# Altium PCB PowerManagement.PcbDoc
Units mm, origin at the board's own origin, x right, y up, seen from the top; angles counter-clockwise.
Board outline 40 x 40 mm, 2 copper layers (L1, L2), stack 1.671 mm thick; 47 components, 37 nets, 181 pads, 107 vias.
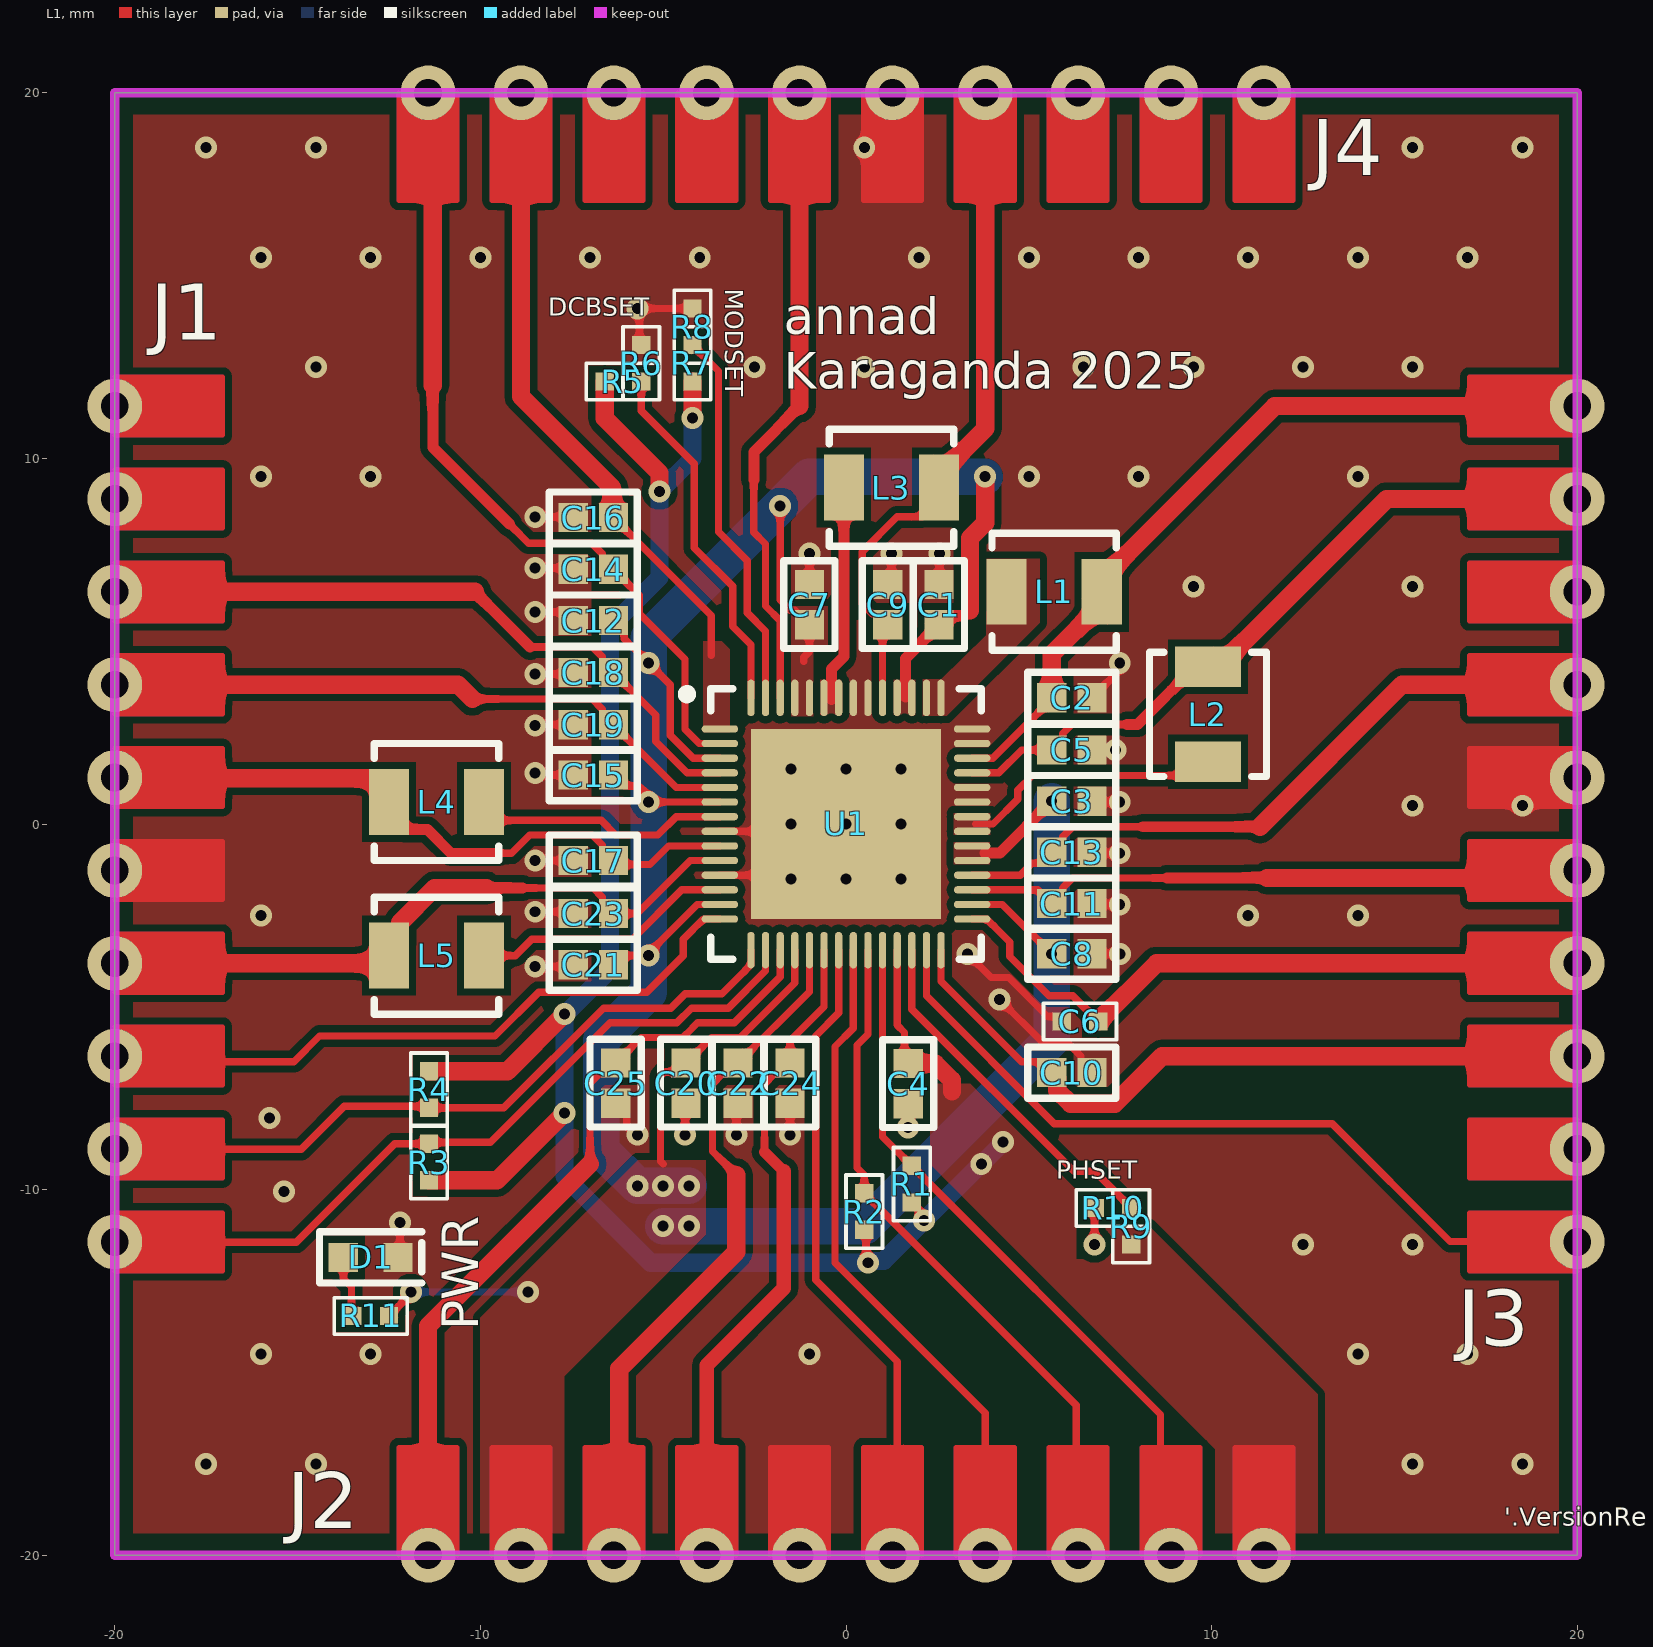
[diagram p0: L1 view]
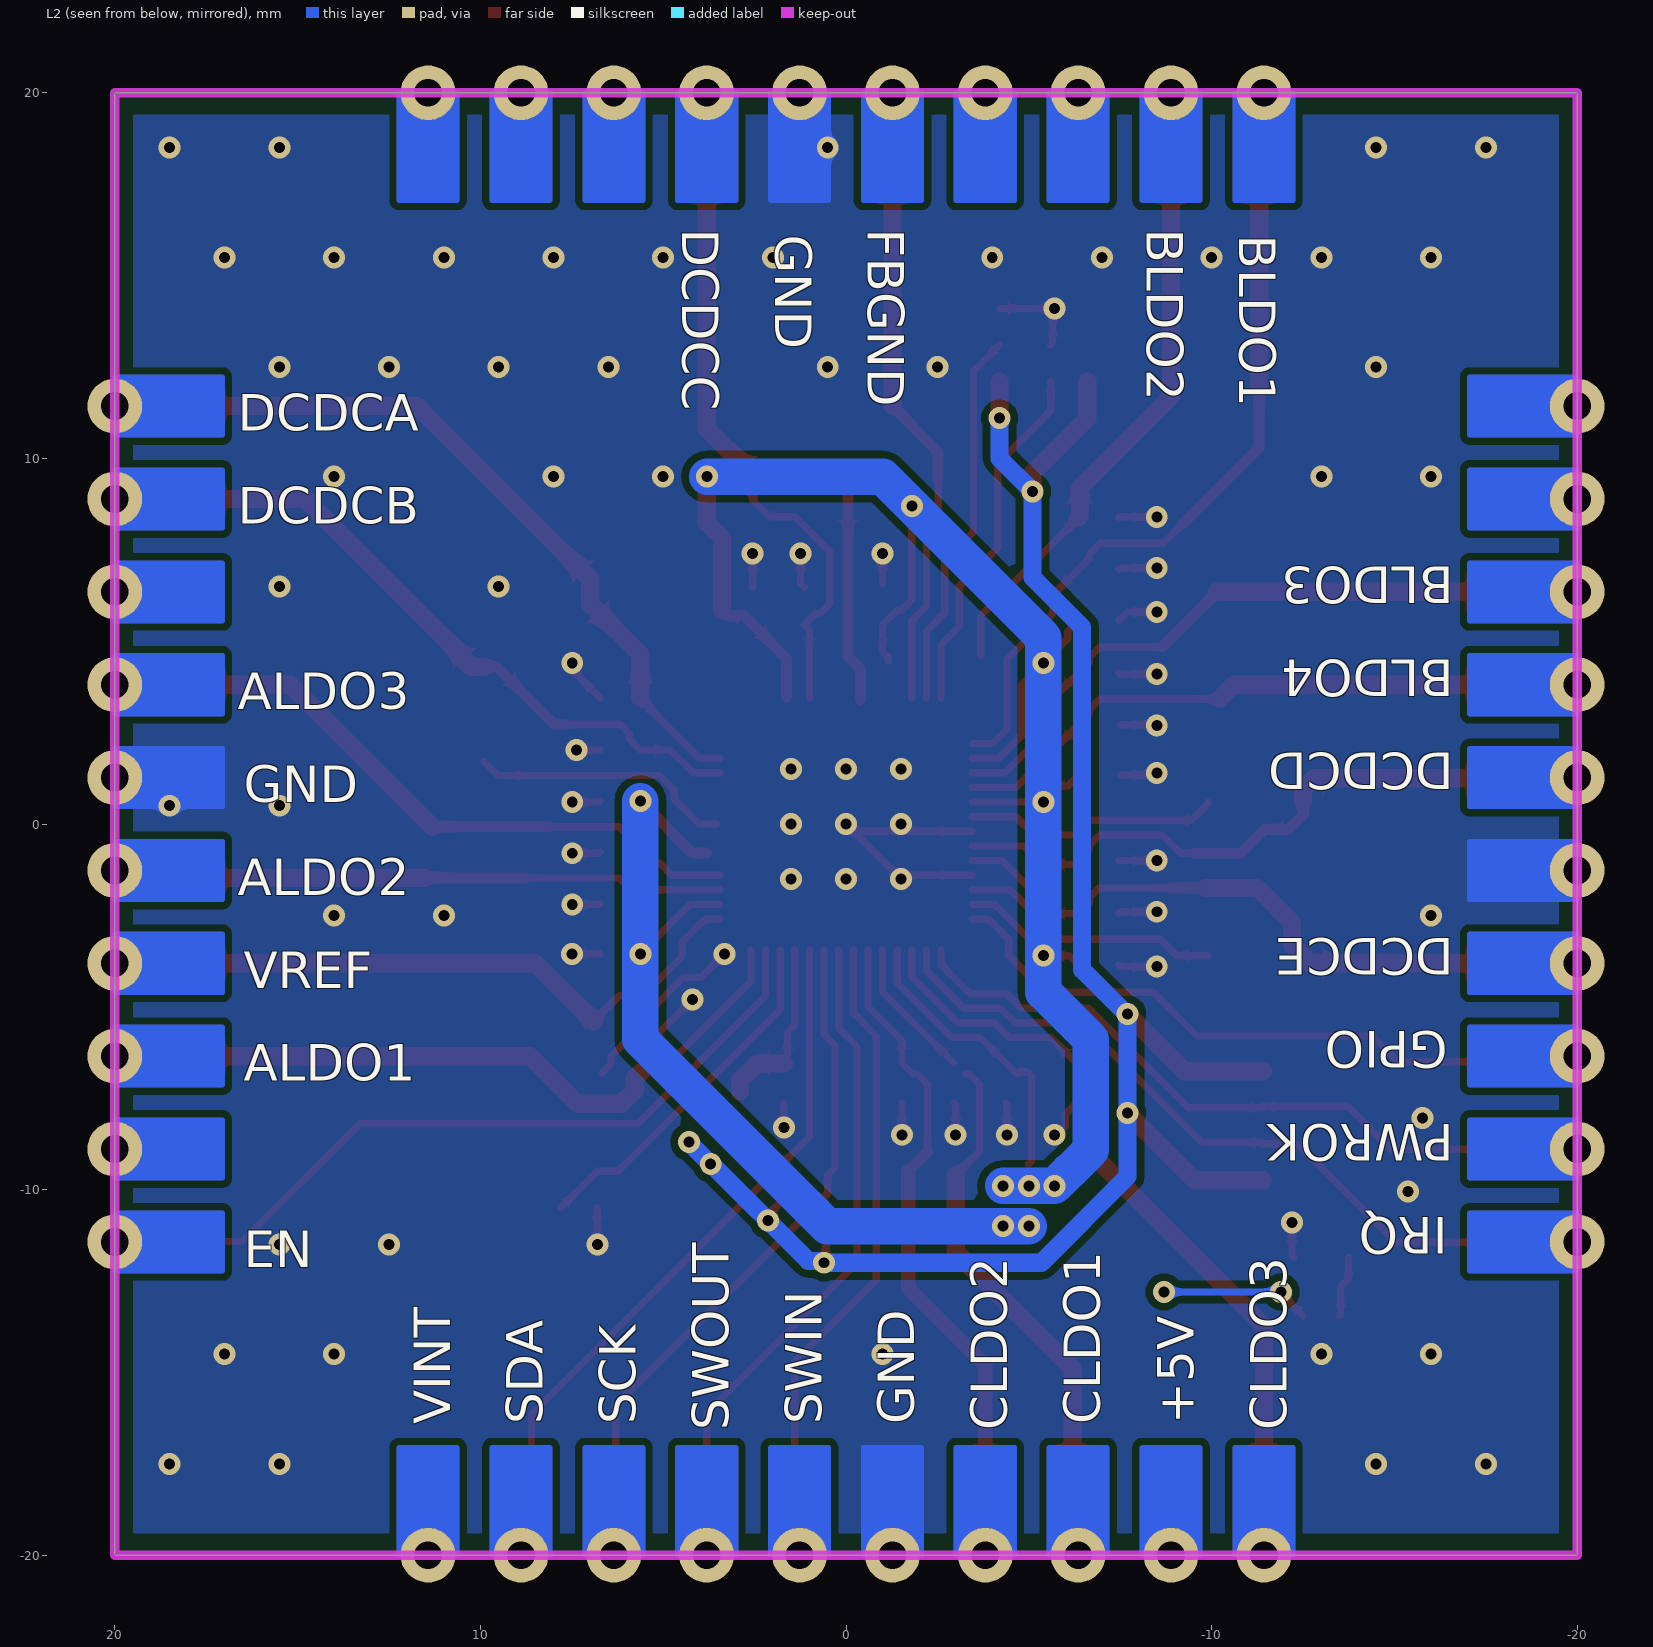
[diagram p1: L2 view, seen from below]
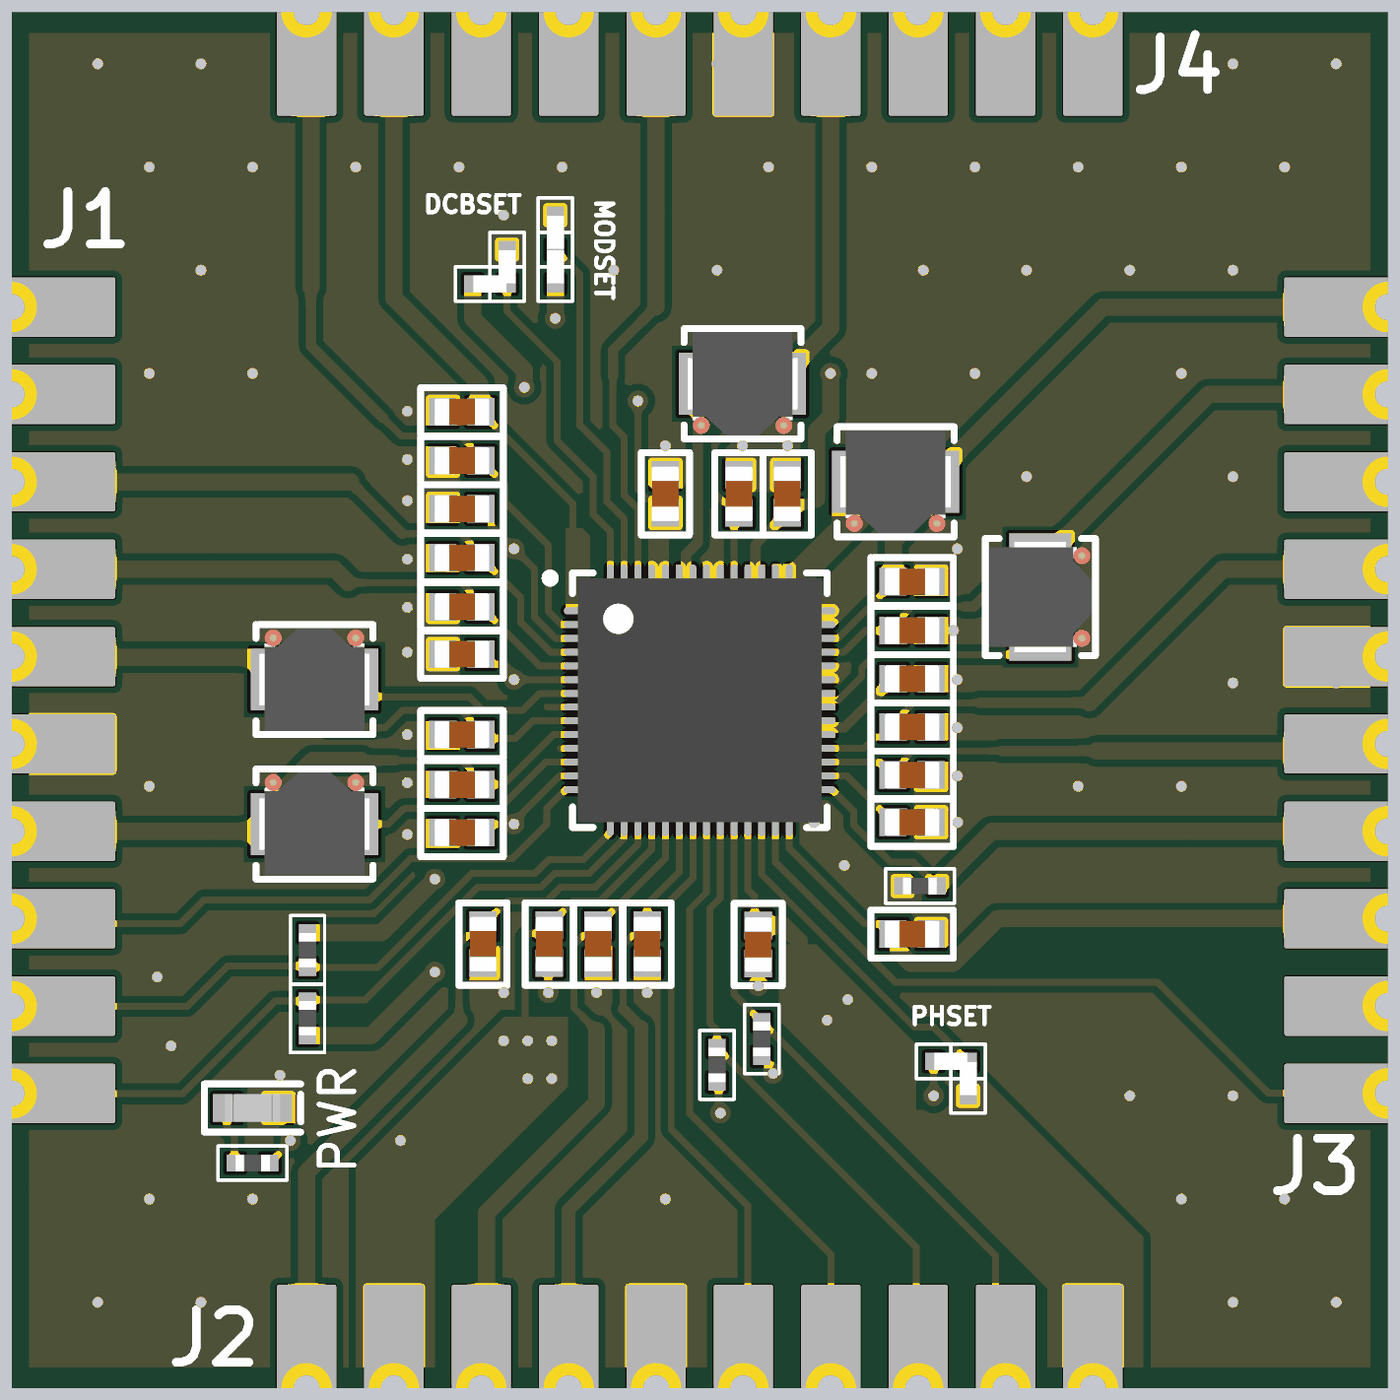
[diagram p2: 3D render of the assembled board from above, using the file's embedded part models]

## Layer stack, top to bottom
Top Solder: solder mask 0.0102, Solder Resist, Dk 3.5
L1: signal copper 0.0356
Dielectric 1: dielectric 1.6, FR-4, Dk 4.8
L2: signal copper 0.0356
Bottom Solder: solder mask 0.0102, Solder Resist, Dk 3.5

## Board outline
-20,-20 -20,20 20,20 20,-20

## Design rules (kind name [scope] priority, off if disabled: settings)
Clearance ExceptionCastallatedHolesKeepOut [HasFootprint('CAST10_2.54MM') vs OnLayer('Keep-Out Layer')] p1: gap=0 ignorepadtopadclearanceinfootprint=FALSE
Clearance [All] p2: gap=0.2 ignorepadtopadclearanceinfootprint=FALSE
ComponentClearance ExceptionJumpResistors [InComponentClass('JumperResistorClass') vs InComponentClass('JumperResistorClass')] p1: gap=0 collisioncheckmode=3 verticalgap=0 showdistances=FALSE
ComponentClearance [All] p2: gap=0.2 collisioncheckmode=3 verticalgap=0.2 showdistances=FALSE
HoleSize [All] p1: absolutevalues=TRUE maxlimit=10 minlimit=0.2 maxpercent=80.000 minpercent=20.000
HoleToHoleClearance [All] p1: gap=0.3 allowstackedmicrovias=TRUE
MinimumSolderMaskSliver [All] p1: minsoldermaskwidth=0.1
PlaneConnect [All] p1: planeconnectstyle=Direct reliefexpansion=0.508 reliefentries=4 reliefconductorwidth=0.254 reliefairgap=0.254
PolygonConnect [All] p1: connectstyle=Direct reliefconductorwidth=0.254 reliefentries=4 polygonreliefangle="90 Angle" airgapwidth=0.254
RoutingVias [All] p1: holewidth=0.3 width=0.6 viastyle="Through Hole" minholewidth=0.3 minwidth=0.6 maxholewidth=0.3 maxwidth=0.6
SilkToSilkClearance [All] p1: silktosilkclearance=0.1
SilkToSolderMaskClearance [IsPad] p1: minsilkscreentomaskgap=0.1 clearancetoexposedcopper=TRUE
SolderMaskExpansion [All] p1: expansion=0.1 istentingtop=FALSE
Width ExceptionWidthArc [HasFootprint('CAST10_2.54MM')] p1: maxlimit=0.2 minlimit=0.1 preferedwidth=0.127
Width ExceptionWidthPowerSupply [InNetClass('PowerNetClass')] p2: maxlimit=1 minlimit=0.1 preferedwidth=0.5
Width [All] p3: maxlimit=0.5 minlimit=0.2 preferedwidth=0.3
23 further rules are at their usual default settings.

## Classes and differential pairs
net class PowerNetClass: PMIC_VINT PS VREF
component class JumperResistorClass: R5 R6 R7 R8 R9 R10

## Components (designator, comment, footprint, x,y, rotation, side; value= is the part's Value field where it differs from the comment)
C1 "10u / 10V" C0603 2.543,6 r90 top
C2 "10u / 10V" C0603 6.175,3.45 r180 top
C3 "10u / 10V" C0603 6.175,0.625 r0 top
C4 "10u / 10V" C0603 1.7,-7.1 r90 top
C5 "10u / 10V" C0603 6.175,2.025 r180 top
C6 "1u / 6.3V" C0402 6.4,-5.4 r0 top
C7 "10u / 10V" C0603 -1,6 r90 top
C8 "10u / 10V" C0603 6.175,-3.55 r180 top
C9 "10u / 10V" C0603 1.143,6 r270 top
C10 "10u / 10V" C0603 6.175,-6.8 r180 top
C11 "10u / 10V" C0603 6.175,-2.175 r180 top
C12 "10u / 10V" C0603 -6.912,5.565 r0 top
C13 "10u / 10V" C0603 6.175,-0.775 r180 top
C14 "4.7u / 10V" C0603 -6.912,6.965 r0 top
C15 "10u / 10V" C0603 -6.912,1.34 r180 top
C16 "4.7u / 10V" C0603 -6.912,8.382 r0 top
C17 "10u / 10V" C0603 -6.912,-1 r0 top
C18 "4.7u / 10V" C0603 -6.912,4.14 r0 top
C19 "4.7u / 10V" C0603 -6.912,2.718 r0 top
C20 "10u / 10V" C0603 -4.375,-7.089 r90 top
C21 "10u / 10V" C0603 -6.912,-3.85 r180 top
C22 "10u / 10V" C0603 -2.953,-7.089 r90 top
C23 "10u / 10V" C0603 -6.912,-2.45 r0 top
C24 "10u / 10V" C0603 -1.53,-7.089 r90 top
C25 "10u / 10V" C0603 -6.3,-7.089 r90 top
D1 "Green" LED_0603 -13,-11.854 r180 top
J1 "CAST10" CAST10_2.54MM -20,11.43 r0 top locked
J2 "CAST10" CAST10_2.54MM -11.43,-20 r90 top locked
J3 "CAST10" CAST10_2.54MM 20,-11.43 r180 top locked
J4 "CAST10" CAST10_2.54MM 11.43,20 r270 top locked
L1 "1.5u / 3A" SPM3015 5.693,6.35 r0 top
L2 "1.5u / 3A" SPM3015 9.9,3 r90 top
L3 "1.5u / 3A" SPM3015 1.243,9.2 r0 top
L4 "1.5u / 3A" SPM3015 -11.2,0.6 r180 top
L5 "1.5u / 3A" SPM3015 -11.2,-3.6 r180 top
R1 "2k" R0402 1.8,-9.85 r270 top
R2 "2k" R0402 0.5,-10.6 r270 top
R3 "2k" R0402 -11.405,-9.246 r270 top
R4 "2k" R0402 -11.405,-7.264 r90 top
R5 "0R" R0402 -6.1,12.1 r0 top
R6 "0R" R0402 -5.6,12.6 r90 top
R7 "0R" R0402 -4.2,12.6 r90 top
R8 "0R" R0402 -4.2,13.6 r90 top
R9 "0R" R0402 7.8,-11 r90 top
R10 "0R" R0402 7.3,-10.5 r180 top
R11 "560R" R0402 -13,-13.454 r180 top
U1 "AXP805" QFN7X7MM 0,0 r0 top locked

## Footprints (in the part's own frame and the unit in brackets; to place one, negate y for a bottom-side part, rotate by r counter-clockwise, add the part's x,y. Pads: shape width x height; smd on the part's side, far side on the other; paste and mask are expansions set on the pad)
C0402 [mm]
  rect 0.5x0.5 smd: 1(-0.5,0) 2(0.5,0)
  silkscreen extent -1,-0.5 1,0.5, body extent -0.5,-0.25 0.5,0.25, height 0.55
C0603 [mm]
  rect 0.8x0.8 smd: 1(-0.55,0) 2(0.55,0)
  silkscreen extent -1.2,-0.7 1.2,0.7, body extent -0.8,-0.4 0.8,0.4, height 0.91
CAST10_2.54MM [mm]
  round 1.5 hole 0.76 mask+0: 1(0,0) 2(0,-2.54) 3(0,-5.08) 4(0,-7.62) 5(0,-10.16) 6(0,-12.7) 7(0,-15.24) 8(0,-17.78) 9(0,-20.32) 10(0,-22.86)
  L1 region: 0,-23.66 2.946,-23.66 2.946,-22.06 0,-22.06 0.347,-22.139 0.625,-22.361 0.78,-22.682 0.78,-23.038 0.625,-23.359 0.347,-23.581 0,-23.66
  L1 region: 0,-18.58 2.946,-18.58 2.946,-16.98 0,-16.98 0.347,-17.059 0.625,-17.281 0.78,-17.602 0.78,-17.958 0.625,-18.279 0.347,-18.501 0,-18.58
  L1 region: 0,-16.04 2.946,-16.04 2.946,-14.44 0,-14.44 0.347,-14.519 0.625,-14.741 0.78,-15.062 0.78,-15.418 0.625,-15.739 0.347,-15.961 0,-16.04
  L1 region: 0,-13.5 2.946,-13.5 2.946,-11.9 0,-11.9 0.347,-11.979 0.625,-12.201 0.78,-12.522 0.78,-12.878 0.625,-13.199 0.347,-13.421 0,-13.5
  L1 region: 0,-8.42 2.946,-8.42 2.946,-6.82 0,-6.82 0.347,-6.899 0.625,-7.121 0.78,-7.442 0.78,-7.798 0.625,-8.119 0.347,-8.341 0,-8.42
  L1 region: 0,-5.88 2.946,-5.88 2.946,-4.28 0,-4.28 0.347,-4.359 0.625,-4.581 0.78,-4.902 0.78,-5.258 0.625,-5.579 0.347,-5.801 0,-5.88
  L1 region: 0,-3.34 2.946,-3.34 2.946,-1.74 0,-1.74 0.347,-1.819 0.625,-2.041 0.78,-2.362 0.78,-2.718 0.625,-3.039 0.347,-3.261 0,-3.34
  L1 region: 0,-0.8 2.946,-0.8 2.946,0.8 0,0.8 0.347,0.721 0.625,0.499 0.78,0.178 0.78,-0.178 0.625,-0.499 0.347,-0.721 0,-0.8
  L1 region: 0,-21.12 2.946,-21.12 2.946,-19.52 0,-19.52 0.347,-19.599 0.625,-19.821 0.78,-20.142 0.78,-20.498 0.625,-20.819 0.347,-21.041 0,-21.12
  L1 region: 0,-10.96 2.946,-10.96 2.946,-9.36 0,-9.36 0.347,-9.439 0.625,-9.661 0.78,-9.982 0.78,-10.338 0.625,-10.659 0.347,-10.881 0,-10.96
  L1 lines w0.127: 0,-23.66 ccw(c0,-22.86) 0,-22.06 2.946,-22.06 2.946,-23.66 0,-23.66 ; 0,-21.12 ccw(c0,-20.32) 0,-19.52 2.946,-19.52 2.946,-21.12 0,-21.12 ; 0,-18.58 ccw(c0,-17.78) 0,-16.98 2.946,-16.98 2.946,-18.58 0,-18.58 ; 0,-16.04 ccw(c0,-15.24) 0,-14.44 2.946,-14.44 2.946,-16.04 0,-16.04 ; 0,-13.5 ccw(c0,-12.7) 0,-11.9 2.946,-11.9 2.946,-13.5 0,-13.5 ; 0,-10.96 ccw(c0,-10.16) 0,-9.36 2.946,-9.36 2.946,-10.96 0,-10.96 ; 0,-8.42 ccw(c0,-7.62) 0,-6.82 2.946,-6.82 2.946,-8.42 0,-8.42 ; 0,-5.88 ccw(c0,-5.08) 0,-4.28 2.946,-4.28 2.946,-5.88 0,-5.88 ; 0,-3.34 ccw(c0,-2.54) 0,-1.74 2.946,-1.74 2.946,-3.34 0,-3.34 ; 0,-0.8 ccw(c0,0) 0,0.8 2.946,0.8 2.946,-0.8 0,-0.8
  L2 region: 0,-1.74 2.946,-1.74 2.946,-3.34 0,-3.34 0.347,-3.261 0.625,-3.039 0.78,-2.718 0.78,-2.362 0.625,-2.041 0.347,-1.819 0,-1.74
  L2 region: 0,-22.06 2.946,-22.06 2.946,-23.66 0,-23.66 0.347,-23.581 0.625,-23.359 0.78,-23.038 0.78,-22.682 0.625,-22.361 0.347,-22.139 0,-22.06
  L2 region: 0,-19.52 2.946,-19.52 2.946,-21.12 0,-21.12 0.347,-21.041 0.625,-20.819 0.78,-20.498 0.78,-20.142 0.625,-19.821 0.347,-19.599 0,-19.52
  L2 region: 0,-16.98 2.946,-16.98 2.946,-18.58 0,-18.58 0.347,-18.501 0.625,-18.279 0.78,-17.958 0.78,-17.602 0.625,-17.281 0.347,-17.059 0,-16.98
  L2 region: 0,-14.44 2.946,-14.44 2.946,-16.04 0,-16.04 0.347,-15.961 0.625,-15.739 0.78,-15.418 0.78,-15.062 0.625,-14.741 0.347,-14.519 0,-14.44
  L2 region: 0,-11.9 2.946,-11.9 2.946,-13.5 0,-13.5 0.347,-13.421 0.625,-13.199 0.78,-12.878 0.78,-12.522 0.625,-12.201 0.347,-11.979 0,-11.9
  L2 region: 0,-9.36 2.946,-9.36 2.946,-10.96 0,-10.96 0.347,-10.881 0.625,-10.659 0.78,-10.338 0.78,-9.982 0.625,-9.661 0.347,-9.439 0,-9.36
  L2 region: 0,-6.82 2.946,-6.82 2.946,-8.42 0,-8.42 0.347,-8.341 0.625,-8.119 0.78,-7.798 0.78,-7.442 0.625,-7.121 0.347,-6.899 0,-6.82
  L2 region: 0,-4.28 2.946,-4.28 2.946,-5.88 0,-5.88 0.347,-5.801 0.625,-5.579 0.78,-5.258 0.78,-4.902 0.625,-4.581 0.347,-4.359 0,-4.28
  L2 region: 0,0.8 2.946,0.8 2.946,-0.8 0,-0.8 0.347,-0.721 0.625,-0.499 0.78,-0.178 0.78,0.178 0.625,0.499 0.347,0.721 0,0.8
  L2 lines w0.127: 0,-23.66 ccw(c0,-22.86) 0,-22.06 2.946,-22.06 2.946,-23.66 0,-23.66 ; 0,-21.12 ccw(c0,-20.32) 0,-19.52 2.946,-19.52 2.946,-21.12 0,-21.12 ; 0,-18.58 ccw(c0,-17.78) 0,-16.98 2.946,-16.98 2.946,-18.58 0,-18.58 ; 0,-16.04 ccw(c0,-15.24) 0,-14.44 2.946,-14.44 2.946,-16.04 0,-16.04 ; 0,-13.5 ccw(c0,-12.7) 0,-11.9 2.946,-11.9 2.946,-13.5 0,-13.5 ; 0,-10.96 ccw(c0,-10.16) 0,-9.36 2.946,-9.36 2.946,-10.96 0,-10.96 ; 0,-8.42 ccw(c0,-7.62) 0,-6.82 2.946,-6.82 2.946,-8.42 0,-8.42 ; 0,-5.88 ccw(c0,-5.08) 0,-4.28 2.946,-4.28 2.946,-5.88 0,-5.88 ; 0,-3.34 ccw(c0,-2.54) 0,-1.74 2.946,-1.74 2.946,-3.34 0,-3.34 ; 0,-0.8 ccw(c0,0) 0,0.8 2.946,0.8 2.946,-0.8 0,-0.8
LED_0603 [mm]
  rect 0.8x0.8 smd: 1(-0.75,0) 2(0.75,0)
  silkscreen extent -1.4,-0.7 1.4,0.7, body extent -0.8,-0.4 0.8,0.4, height 0.37
QFN7X7MM [mm]
  oval 1x0.2 smd: 1(-3.45,2.6) 2(-3.45,2.2) 3(-3.45,1.8) 4(-3.45,1.4) 5(-3.45,1) 6(-3.45,0.6) 7(-3.45,0.2) 8(-3.45,-0.2) 9(-3.45,-0.6) 10(-3.45,-1) 11(-3.45,-1.4) 12(-3.45,-1.8) 13(-3.45,-2.2) 14(-3.45,-2.6) 29(3.45,-2.6) 30(3.45,-2.2) 31(3.45,-1.8) 32(3.45,-1.4) 33(3.45,-1) 34(3.45,-0.6) 35(3.45,-0.2) 36(3.45,0.2) 37(3.45,0.6) 38(3.45,1) 39(3.45,1.4) 40(3.45,1.8) 41(3.45,2.2) 42(3.45,2.6)
  oval 0.2x1 smd: 15(-2.6,-3.45) 16(-2.2,-3.45) 17(-1.8,-3.45) 18(-1.4,-3.45) 19(-1,-3.45) 20(-0.6,-3.45) 21(-0.2,-3.45) 22(0.2,-3.45) 23(0.6,-3.45) 24(1,-3.45) 25(1.4,-3.45) 26(1.8,-3.45) 27(2.2,-3.45) 28(2.6,-3.45) 43(2.6,3.45) 44(2.2,3.45) 45(1.8,3.45) 46(1.4,3.45) 47(1,3.45) 48(0.6,3.45) 49(0.2,3.45) 50(-0.2,3.45) 51(-0.6,3.45) 52(-1,3.45) 53(-1.4,3.45) 54(-1.8,3.45) 55(-2.2,3.45) 56(-2.6,3.45)
  rect 5.2x5.2 smd: 57(0,0)
  silkscreen extent -4.47,-3.7 3.7,3.7, body extent -3.55,-3.55 3.55,3.55, height 0.8
R0402 [mm]
  rect 0.5x0.5 smd: 1(-0.5,0) 2(0.5,0)
  silkscreen extent -1,-0.5 1,0.5, body extent -0.5,-0.25 0.5,0.25, height 0.41
SPM3015 [mm]
  rect 1.1x1.8 smd: 1(-1.3,0) 2(1.3,0)
  silkscreen extent -1.7,-1.6 1.7,1.6, body extent -1.6,-1.5 1.6,1.5, height 1.51

## Part data
C1 C2 C3 C4 C5 C7 C8 C9 C10 C11 C12 C13 C15 C17 C20 C21 C22 C23 C24 C25: library part C1608X5R1A106K080AC, "C Series 0603 10 uF 10 V ±10 % Tolerance X5R SMT Multilayer Ceramic Capacitor", Capacitance=10uF, Case Code (Imperial)=0603, Case Code (Metric)=1608, Dielectric=X5R, Dielectric Material=4241ConductorMaterial, Manufacturer=TDK, Max Operating Temperature=85°C, Min Operating Temperature=-55°C, Package Quantity=1, Supplier Part Number 1=445-C1608X5R1A106K080ACCT-ND, Tolerance=10%, Voltage=10V, Case/Package=0603, Category="Ceramic Capacitors", ComponentLink1Description=https://datasheet.ciiva.com/22694/1796654-22694118.pdf?src-supplier=Element14, ComponentLink1URL=https://datasheet.ciiva.com/22694/1796654-22694118.pdf?src-supplier=Element14, ComponentLink2Description=https://datasheet.ciiva.com/6288/tdkmlcccaprange-6288222.pdf?src-supplier=Digikey, ComponentLink2URL=https://datasheet.ciiva.com/6288/tdkmlcccaprange-6288222.pdf?src-supplier=Digikey, ComponentLink3Description=https://datasheet.ciiva.com/6288/tdkmlcccaprange-6288220.pdf?src-supplier=Digikey, ComponentLink3URL=https://datasheet.ciiva.com/6288/tdkmlcccaprange-6288220.pdf?src-supplier=Digikey, ComponentLink4Description=https://datasheet.ciiva.com/16449/mlcc-commercial-general-en-16449573.pdf?src-supplier=Future+Electronics, ComponentLink4URL=https://datasheet.ciiva.com/16449/mlcc-commercial-general-en-16449573.pdf?src-supplier=Future+Electronics, ComponentLink5Description=https://datasheet.ciiva.com/48671/e412-c-48671301.pdf?src-supplier=Avnet, ComponentLink5URL=https://datasheet.ciiva.com/48671/e412-c-48671301.pdf?src-supplier=Avnet, ComponentLink6Description=https://datasheet.ciiva.com/23802/1796654-23802763.pdf?src-supplier=Newark, ComponentLink6URL=https://datasheet.ciiva.com/23802/1796654-23802763.pdf?src-supplier=Newark, ComponentLink7Description=https://datasheet.ciiva.com/7975/1796654-7975065.pdf?src-supplier=Element14, ComponentLink7URL=https://datasheet.ciiva.com/7975/1796654-7975065.pdf?src-supplier=Element14, ComponentLink8Description=https://datasheet.ciiva.com/28577/1744655-28577071.pdf?src-supplier=Element14, ComponentLink8URL=https://datasheet.ciiva.com/28577/1744655-28577071.pdf?src-supplier=Element14, ComponentLink9Description=https://datasheet.ciiva.com/6288/tdkmlcccaprange-6288223.pdf?src-supplier=Digikey, ComponentLink9URL=https://datasheet.ciiva.com/6288/tdkmlcccaprange-6288223.pdf?src-supplier=Digikey, ComponentLink10Description=https://datasheet.ciiva.com/28577/mlcc-commercial-general-en-28577085.pdf?src-supplier=Element14, ComponentLink10URL=https://datasheet.ciiva.com/28577/mlcc-commercial-general-en-28577085.pdf?src-supplier=Element14, Construction=Flat, Depth=0.8mm, Height=0.8mm, Lead Free="Lead Free", Length=1.6mm, Manufacturer Part Number=C1608X5R1A106K080AC, Material=4241ConductorMaterial, Mount="Surface Mount", Number of Pins=2NUMBER, Packaging="Tape and Reel", Pricing 1="1=0.25, 10=0.145, 100=0.0918, 1000=0.06453 (USD)", Reach SVHC Compliant=No, RoHS=Yes, RoHS Compliant=Yes, Series=C, Stock 1=79274, Supplier 1=Digikey, Termination=SMD/SMT, Thickness=0.035inch, Voltage Rating=10V, Voltage Rating (DC)=10V, Weight=7.1E-05oz, Width=0.031inch
C6: library part CC0402KRX5R5BB105, "Multilayer Ceramic Capacitor, 1 uF, 100 V, ï¿½ 10%, X7R, 0402 [1005 Metric]", Capacitance=1uF, Case Code (Imperial)=0402, Case Code (Metric)=1005, Dielectric=X5R, Dielectric Material=4241ConductorMaterial, Manufacturer=Yageo, Max Operating Temperature=85°C, Min Operating Temperature=-55°C, Supplier Part Number 1=311-1438-1-ND, Temperature Coefficient=30ppm/°C, Tolerance=10%, Voltage Rating=6.3V, Case/Package=0402, Category="Ceramic Capacitors", ComponentLink1Description=https://datasheet.ciiva.com/5789/70765-5789520.pdf?src-supplier=Farnell, ComponentLink1URL=https://datasheet.ciiva.com/5789/70765-5789520.pdf?src-supplier=Farnell, ComponentLink2Description=https://datasheet.ciiva.com/8033/70765-8033646.pdf?src-supplier=Element14, ComponentLink2URL=https://datasheet.ciiva.com/8033/70765-8033646.pdf?src-supplier=Element14, ComponentLink3Description=https://datasheet.ciiva.com/176/mlccorderingcode-176610.pdf?src-supplier=Digikey, ComponentLink3URL=https://datasheet.ciiva.com/176/mlccorderingcode-176610.pdf?src-supplier=Digikey, ComponentLink4Description=https://datasheet.ciiva.com/176/mlccorderingcode-176609.pdf?src-supplier=Digikey, ComponentLink4URL=https://datasheet.ciiva.com/176/mlccorderingcode-176609.pdf?src-supplier=Digikey, ComponentLink5Description=https://datasheet.ciiva.com/176/mlccorderingcode-176611.pdf?src-supplier=Digikey, ComponentLink5URL=https://datasheet.ciiva.com/176/mlccorderingcode-176611.pdf?src-supplier=Digikey, ComponentLink6Description=https://datasheet.ciiva.com/8033/1525783-8033644.pdf?src-supplier=Element14, ComponentLink6URL=https://datasheet.ciiva.com/8033/1525783-8033644.pdf?src-supplier=Element14, ComponentLink7Description=https://datasheet.ciiva.com/28450/1359354-28450285.pdf?src-supplier=Element14, ComponentLink7URL=https://datasheet.ciiva.com/28450/1359354-28450285.pdf?src-supplier=Element14, ComponentLink8Description=https://datasheet.ciiva.com/8033/1525783-8033643.pdf?src-supplier=Element14, ComponentLink8URL=https://datasheet.ciiva.com/8033/1525783-8033643.pdf?src-supplier=Element14, ComponentLink9Description=https://datasheet.ciiva.com/11464/upy-gphc-x5r-4v-to-50v-12-11464863.pdf?src-supplier=Avnet, ComponentLink9URL=https://datasheet.ciiva.com/11464/upy-gphc-x5r-4v-to-50v-12-11464863.pdf?src-supplier=Avnet, ComponentLink10Description=AliExpress, ComponentLink10URL=https://aliexpress.ru/item/1005001948033366.html, Depth=0.5mm, Halogen Free=5694HalogenFree, Height=0.5mm, Lead Free=5697LeadFree, Length=1mm, Manufacturer Part Number=CC0402KRX5R5BB105, Material=4241ConductorMaterial, Mount="Surface Mount", Number of Pins=2, Packaging="Tape and Reel", Pricing 1="1=0.1, 10=0.054, 100=0.0318, 1000=0.02066, 2500=0.01646, 5000=0.01625 (USD)", Radiation Hardening=No, Reach SVHC Compliant=No, RoHS=Yes, RoHS Compliant=Yes, Series=CC, Stock 1=21109651, Supplier 1=Digikey, Termination=SMD/SMT, Voltage Rating (AC)=6.3V, Voltage Rating (DC)=6.3V, Width=0.5mm
C14 C16 C18 C19: library part C1608X5R1A475K080AE, "C Series 0603 4.7 uF 10 V ±10 %Tolerance X5R SMT Multilayer Ceramic Capacitor", Manufacturer=TDK, Supplier Part Number 1=445-175224-1-ND, Category="Ceramic Capacitors", ComponentLink1Description=https://product.tdk.com/info/en/catalog/datasheets/mlcc_commercial_soft_en.pdf?src-supplier=Digikey, ComponentLink1URL=https://product.tdk.com/info/en/catalog/datasheets/mlcc_commercial_soft_en.pdf?src-supplier=Digikey, ComponentLink2Description=https://product.tdk.com/info/en/catalog/datasheets/mlcc_commercial_soft_en.pdf?ref_disty=digikey&src-supplier=Digikey, ComponentLink2URL=https://product.tdk.com/info/en/catalog/datasheets/mlcc_commercial_soft_en.pdf?ref_disty=digikey&src-supplier=Digikey, ComponentLink3Description=https://product.tdk.com/info/en/catalog/spec/mlccspec_commercial_soft_en.pdf?src-supplier=Digikey, ComponentLink3URL=https://product.tdk.com/info/en/catalog/spec/mlccspec_commercial_soft_en.pdf?src-supplier=Digikey, ComponentLink4Description=https://datasheet.octopart.com/C1608X5R1A475K080AE-TDK-datasheet-60278151.pdf?src-supplier=Future+Electronics, ComponentLink4URL=https://datasheet.octopart.com/C1608X5R1A475K080AE-TDK-datasheet-60278151.pdf?src-supplier=Future+Electronics, ComponentLink5Description=https://datasheet.octopart.com/C1608X5R1A475K080AE-TDK-datasheet-159617022.pdf?src-supplier=TME, ComponentLink5URL=https://datasheet.octopart.com/C1608X5R1A475K080AE-TDK-datasheet-159617022.pdf?src-supplier=TME, Manufacturer Part Number=C1608X5R1A475K080AE, Pricing 1="1=0.26, 10=0.15, 100=0.0952, 1000=0.06716 (USD)", RoHS=Yes, Stock 1=16947, Supplier 1=Digikey
D1: library part "KG EELP41.22-PHRH-35-A8J8-20-R18", "Led Green Diffused 0603 SMD", Manufacturer="Osram Opto", Supplier Part Number 1=720-P4122PHRH35A8J82, Category=Optoelectronics, Manufacturer Part Number="KG EELP41.22-PHRH-35-A8J8-20-R18", Pricing 1="1=0.25, 10=0.138, 50=0.138, 100=0.064, 1000=0.046, 10000=0.035 (USD)", RoHS=No, Stock 1=7148, Supplier 1=Mouser
J1 J2 J3 J4: library part CAST10_2.54MM, "10x Castellated Plated Through-Holes, 2.54mm Pitch."
L1 L2 L3 L4 L5: library part SPM3015T-1R5M-LR, "Inductor Power Shielded Wirewound 1.5uH 20% 100KHz Metal 3.3A 0.0624Ohm DCR T/R", Case/Package=Nonstandard, Current Rating=3.3A, DC Resistance (DCR)=62.4mR, Inductance=1.5uH, Inductance Tolerance=20%, Manufacturer=TDK, Max Operating Temperature=125°C, Min Operating Temperature=-40°C, Saturation Current=4.5A, Supplier Part Number 1=445-174448-1-ND, Test Frequency=100kHz, Category="Fixed Inductors", ComponentLink1Description=https://product.tdk.com/info/en/catalog/datasheets/inductor_commercial_power_spm3015-lr_en.pdf?src-supplier=Digikey, ComponentLink1URL=https://product.tdk.com/info/en/catalog/datasheets/inductor_commercial_power_spm3015-lr_en.pdf?src-supplier=Digikey, ComponentLink2Description=http://www.farnell.com/datasheets/2053094.pdf?src-supplier=Element14, ComponentLink2URL=http://www.farnell.com/datasheets/2053094.pdf?src-supplier=Element14, Core Material=Metal, Height - Seated (Max)=0.047inch, Length=0.126inch, Manufacturer Part Number=SPM3015T-1R5M-LR, Mount="Surface Mount", Packaging="Cut Tape", Pricing 1="1=1, 10=0.82, 100=0.674, 1000=0.55442 (USD)", Reach SVHC Compliant=No, RMS Current (Irms)=3.3A, RoHS=Yes, RoHS Compliant=Yes, Series=SPM-LR, Shielding=Shielded, Supplier 1=Digikey, Tolerance=20%, Width=0.118inch
R1 R2 R3 R4: library part RC0402BR-072KL, "General Purpose Chip Resistor Thick Film 0402 2kOhm 0.1% Paper T/R", Manufacturer=Yageo, Supplier Part Number 1=13-RC0402BR-072KLCT-ND, Category="Chip SMD Resistors", Manufacturer Part Number=RC0402BR-072KL, Pricing 1="1=0.23, 10=0.127, 100=0.0898, 1000=0.06936, 2500=0.05763, 5000=0.04998 (USD)", RoHS=Yes, RoHS Compliant=Yes, Stock 1=18357, Supplier 1=Digikey
R5 R6 R7 R8 R9 R10: library part PA0402-R-070RL, "Zero Ohm Resistor, Jumper, 0402 [1005 Metric], Metal Film, 63 mW, 11 A, Surface Mount", Manufacturer=Yageo, Supplier Part Number 1=YAG5756CT-ND, Category="Chip SMD Resistors", ComponentLink1Description=http://www.yageo.com/NewPortal/_en/search/productDocs.jsp?YageoPartNumber=PA0402-R-070RL&src-supplier=Digikey, ComponentLink1URL=http://www.yageo.com/NewPortal/_en/search/productDocs.jsp?YageoPartNumber=PA0402-R-070RL&src-supplier=Digikey, ComponentLink2Description=https://datasheet.octopart.com/PA0402-R-070RL-Yageo-datasheet-137700557.pdf?src-supplier=Future+Electronics, ComponentLink2URL=https://datasheet.octopart.com/PA0402-R-070RL-Yageo-datasheet-137700557.pdf?src-supplier=Future+Electronics, Height=350um, Manufacturer Part Number=PA0402-R-070RL, Pricing 1="1=0.9, 10=0.582, 25=0.4972, 50=0.4436, 100=0.3982, 250=0.3484, 500=0.31718, 1000=0.29067, 5000=0.24347 (USD)", RoHS=Yes, Stock 1=19936, Supplier 1=Digikey
R11: library part RC0402FR-13560RL, "SMD Chip Resistor, 560 Ohm, ± 1%, 63 mW, 0402 [1005 Metric], Thick Film, General Purpose", Manufacturer=Yageo, Supplier Part Number 1=13-RC0402FR-13560RLCT-ND, Category="Chip SMD Resistors", ComponentLink1Description=https://datasheet.ciiva.com/8885/pyu-rc0402-51-rohs-l-6-8885291.pdf?src-supplier=Avnet, ComponentLink1URL=https://datasheet.ciiva.com/8885/pyu-rc0402-51-rohs-l-6-8885291.pdf?src-supplier=Avnet, Lead Free=5697LeadFree, Manufacturer Part Number=RC0402FR-13560RL, Pricing 1="1=0.1, 10=0.007, 100=0.0051, 1000=0.00408, 2500=0.00306, 10000=0.00286 (USD)", RoHS=Yes, Stock 1=81328, Supplier 1=Digikey
U1: "PMIC for Multi-Core High-Performance System", Ambient Temperature Range High="85 °C", Manufacturer=X-Powers, Max Junction Temperature (Tj)="125 °C", Max Supply Voltage="5.5 V", Min Supply Voltage="3 V", Supplier Part Number 1=1005008574347512, Category="Power Management (PMIC)", ComponentLink1Description=datasheet, ComponentLink1URL=https://linux-sunxi.org/images/b/bc/AXP805_Datasheet_V1.0_en.pdf, ComponentLink2Description="Supplier Link 1", ComponentLink2URL=https://aliexpress.ru/item/1005008574347512.html?sku_id=12000045786397552, Height="800 µm", Manufacturer Part Number=AXP805, Max Operating Temperature="125 °C", Number of Outputs=9, Supplier 1=AliExpress, Supplier Note 1="For prototype"

## Via types
v1: diameter 0.6, hole 0.3, L1 to L2, tented both sides, 107 vias

## Nets (pads, with @x,y where several pads share a name; then routed paths per layer and width w, separated by ;. In a path a pad name is that pad's centre, name@x,y a point inside that pad or via, vN(x,y) a via of type N, cw(c..) or ccw(c..) an arc to the next point about the centre after c; other vN are vias at no path point)
ALDO1: C10.2 J3.3 U1.28 | length 17.1
  L1 w0.2: U1.28 2.6,-4.3 4.8,-6.5 5.325,-6.5 C10.2@5.374,-6.549
  L1 w0.5: C10.2 5.775,-6.95 5.775,-7.286 6.139,-7.65 7.35,-7.65 8.65,-6.35 17.054,-6.35
ALDO2: C11.2 J3.5 U1.31 | length 14.1
  L1 w0.2: U1.31 5.25,-1.8 C11.2 5.925,-1.875 5.925,-1.751 5.957,-1.719 6.201,-1.475 8.775,-1.475
  L1 w0.3: 8.775,-1.475 11.525,-1.475
  L1 w0.5: 11.525,-1.475 17.054,-1.475
ALDO3: C13.2 J3.7 U1.32 | length 15.8
  L1 w0.2: U1.32 4.762,-1.4 5.089,-1.073 5.327,-1.073 5.925,-0.475 5.925,-0.351 6.201,-0.075 7.249,-0.075 8.125,-0.075
  L1 w0.3: 8.125,-0.075 11.325,-0.075
  L1 w0.5: 11.325,-0.075 15.21,3.81 17.054,3.81
BLDO1: C14.2 J4.10 U1.2 | length 21.5
  L1 w0.2: -9.2,8.2 -8.682,7.682 -6.955,7.682 -6.662,7.389 -6.662,7.265 -5.657,6.259 -5.657,5.757 -4.405,4.505 -4.405,2.589 -4.016,2.2 U1.2
  L1 w0.3: -11.3,12 -11.3,10.3 -9.2,8.2
  L1 w0.5: -11.3,12 -11.3,17.054 -11.3,19.07
BLDO2: C16.2 J4.9 U1.1 | length 16.7
  L1 w0.2: C16.2 -3.683,5.702 -3.683,4.617
  L1 w0.5: -8.89,19.2 -8.89,17.054 -8.89,11.69 -6.403,9.203 -6.403,8.422 C16.2
BLDO3: C18.2 J1.3 U1.4 | length 18.3
  L1 w0.2: -19.2,6.35 -17.054,6.35 ; -8.64,4.84 -6.938,4.84 -6.67,4.572 -6.67,4.557 -6.662,4.549 -6.662,4.44 -5.205,2.983 -5.205,2.258 -4.347,1.4 U1.4
  L1 w0.3: -10.15,6.35 -8.64,4.84
  L1 w0.5: -17.054,6.35 -10.15,6.35
BLDO4: C19.2 J1.4 U1.5 | length 17
  L1 w0.2: -10.218,3.418 -6.938,3.418 -6.662,3.142 -6.662,3.018 -4.645,1 U1.5
  L1 w0.5: -19.2,3.81 -17.054,3.81 -10.61,3.81 -10.218,3.418
CLDO1: C22.2 J2.3 U1.19 | length 15.9
  L1 w0.2: C22.2@-3.253,-6.839 -3.377,-6.839 -3.653,-7.115 -3.653,-8.947 -3,-9.6 ; C22.2 -1,-4.586 U1.19
  L1 w0.5: -6.2,-17.054 -6.2,-14.9 -3,-11.7 -3,-9.6
CLDO2: C24.2 J2.4 U1.20 | length 17.6
  L1 w0.2: -3.81,-19.2 -3.81,-17.054 ; -2.23,-8.97 -2.23,-7.115 -1.955,-6.839 -1.83,-6.839 C24.2 -1.53,-5.93 -0.6,-5 U1.20
  L1 w0.3: -2.23,-8.97 -1.7,-9.5
  L1 w0.4: -3.81,-17.054 -3.81,-14.81 -1.7,-12.7 -1.7,-9.5
CLDO3: C25.2 J2.1 U1.17 | length 18.9
  L1 w0.2: -7,-9.3 -7,-7.089 -6.75,-6.839 -6.6,-6.839 C25.2 -5.6,-5.839 -4.461,-5.839 -4.365,-5.743 -4.364,-5.742 -4.061,-5.439 -3.058,-5.439 -1.8,-4.181 U1.17
  L1 w0.5: -11.43,-17.054 -11.43,-13.73 -7,-9.3
GND: C1.2 C2.1 C3.2 C4.1 C5.1 C6.1 C7.2 C8.1 C9.1 C10.1 C11.1 C12.1 C13.1 C14.1 C15.2 C16.1 C17.1 C18.1 C19.1 C20.1 C21.2 C22.1 C23.1 C24.1 C25.1 D1.1 J1.6 J2.5 J3.6 J4.5 R6.2 R8.2 R10.2 U1.8 U1.11 U1.37 U1.38 U1.41 U1.42 U1.48 U1.49 U1.57 | length 39.6
  L1 w0.2: D1.1 -12.2,-11.804 v1(-12.2,-10.9) ; v1(-8.5,-3.9) -7.512,-3.9 C21.2 ; v1(-8.5,1.4) -8.44,1.34 C15.2@-7.513,1.34 ; v1(-8.5,4.1) -7.503,4.1 C18.1 ; v1(-8.5,5.8) -7.698,5.8 C12.1 ; v1(-8.5,7) -7.498,7 C14.1 ; v1(-8.5,8.4) -7.48,8.4 C16.1 ; v1@-8.3,2.7 -8.282,2.718 C19.1@-7.51,2.718 ; -8.2,-2.4 -7.512,-2.4 C23.1 ; -8.2,-1 C17.1 ; C25.1 -6,-7.939 -6,-8.056 ; -5.999,-8.056 -5.999,-8.283 -5.7,-8.582 v1@-5.7,-8.6 ; v1(-5.7,14.1) v1@-5.65,14.05 ; R6.2 -5.65,13.15 v1@-5.65,14.05 ; v1(-4.4,-8.5) -4.4,-7.664 C20.1 ; R8.2 -5.6,14.1 v1@-5.65,14.05 ; U1.11 -1.4,-1.4 U1.57@-0.2,-0.2 ; U1.8 U1.57@-0.2,-0.2 ; v1(-3,-8.5) -3,-7.686 C22.1 ; v1(-1.53,-8.5) C24.1 ; C7.2 v1(-1,7.4) ; v1(0,0) U1.57@-0.2,-0.2 ; C9.1@1.143,6.475 1.243,6.575 v1@1.243,7.5 ; v1(1.7,-8.3) C4.1 ; C1.2@2.543,6.475 2.552,6.484 v1@2.552,7.5 ; v1(3.325,-3.55) 3.975,-4.2 4.449,-4.2 5.512,-5.264 5.764,-5.264 C6.1 ; v1(4.2,-4.8) 5.35,-5.95 6.025,-5.95 6.425,-6.35 6.425,-6.554 C10.1@6.671,-6.8 ; C8.1 v1(7.5,-3.55) ; C11.1 6.75,-2.2 v1(7.488,-2.2) ; C13.1 6.75,-0.8 v1(7.488,-0.8) ; C3.2 6.75,0.6 v1(7.488,0.6) ; C5.1 v1(7.375,2.025) ; C2.1 7.411,4.136 7.411,4.323 v1(7.488,4.4) ; v1(6.8,-11.5) R10.2
  other v1: -17.5,-17.5 -14.5,-17.5 15.5,-17.5 18.5,-17.5 -16,-14.5 -13,-14.5 -1,-14.5 14,-14.5 17,-14.5 12.5,-11.5 15.5,-11.5 -15.37,-10.05 -5.7,-8.5 -15.77,-8.042 -16,-2.5 11,-2.5 14,-2.5 -8.5,-2.4 -1.5,-1.5 0,-1.5 1.5,-1.5 -8.5,-1 -1.5,0 1.5,0 15.5,0.5 18.5,0.5 -1.5,1.5 0,1.5 1.5,1.5 -8.5,2.7 9.5,6.5 15.5,6.5 1.243,7.4 2.552,7.4 -16,9.5 -13,9.5 5,9.5 8,9.5 14,9.5 -14.5,12.5 -2.5,12.5 0.5,12.5 6.5,12.5 9.5,12.5 12.5,12.5 15.5,12.5 -16,15.5 -13,15.5 -10,15.5 -7,15.5 -4,15.5 2,15.5 5,15.5 8,15.5 11,15.5 14,15.5 17,15.5 -17.5,18.5 -14.5,18.5 0.5,18.5 15.5,18.5 18.5,18.5
NetD1_2: D1.2 R11.2 | length 1.7
  L1 w0.2: D1.2 -13.746,-11.858 -13.746,-12.437 -13.525,-12.657 -13.525,-13.429 R11.2
NetL1_1: L1.1 U1.43 U1.44
NetL2_1: L2.1 U1.35 U1.36 | length 7.2
  L1 w0.2: 3.55,0 4.022,0 4.7,0.678 4.7,0.924 5.101,1.325 6.201,1.325 9.525,1.325 L2.1
NetL3_1: L3.1 U1.50 U1.51 | length 5.9
  L1 w0.3: -0.4,3.411 -0.4,4.24 -0.057,4.583 L3.1
NetL4_1: L4.1 U1.7 | length 7.1
  L1 w0.2: L4.1 -9.9,0.55 -9.45,0.1 -6.697,0.1 -6.297,-0.3 -5.146,-0.3 -4.646,0.2 U1.7
NetL5_1: L5.1 U1.12 | length 7.2
  L1 w0.2: L5.1 -9.049,-3.6 -8.599,-3.15 -6.938,-3.15 -5.838,-3.15 -4.488,-1.8 U1.12
PMIC_DCBSET: R5.2 R6.1 U1.56 | length 9.9
  L1 w0.2: R6.1 -5.6,11.3 -4.15,9.85 -4.15,7.55 -3.1,6.5 -3.1,5.4 -2.6,4.9 U1.56
PMIC_DCDCA: C2.2 J3.10 L1.2 U1.40 | length 18.7
  L1 w0.2: U1.40 4.016,1.8 5.325,3.109 5.325,3.15 C2.2
  L1 w0.5: C2.2 5.625,4.632 6.993,6 6.993,6.7 7.293,7 7.3,7 11.73,11.43 17.054,11.43
PMIC_DCDCB: C5.2 J3.9 L2.2 U1.39 | length 16.8
  L1 w0.2: U1.39 3.85,1.4 4.181,1.4 4.806,2.025 C5.2 5.925,2.325 5.925,2.475 6.175,2.725 7.69,2.725
  L1 w0.3: 7.69,2.725 7.975,2.725 9.55,4.3 L2.2
  L1 w0.5: L2.2 10.25,4.3 10.55,4.6 10.55,4.65 14.79,8.89 17.054,8.89
PMIC_DCDCC: C9.2 J4.4 L3.2 U1.47 | length 18
  L1 w0.2: U1.47 1,5.307 C9.2 0.843,5.75 0.719,5.75 0.443,6.026 0.443,7.449 1.394,8.4 2.093,8.4 2.543,8.85 L3.2
  L1 w0.5: L3.2 2.543,9.55 3.81,10.817 3.81,17.054 3.81,19.2
PMIC_DCDCD: C17.2 J1.5 L4.2 U1.9 | length 17.7
  L1 w0.2: -9.5,-0.8 -9.149,-0.8 -8.649,-0.3 -6.938,-0.3 -6.662,-0.576 -6.662,-0.7 C17.2 ; C17.2@-6.256,-1.106 -5.359,-1.106 -4.853,-0.6 U1.9
  L1 w0.3: L4.2 -12.5,0.25 -12.1,-0.15 -11.45,-0.15 -10.8,-0.8 -9.5,-0.8
  L1 w0.5: -19.2,1.25 -17.054,1.25 -12.8,1.25 -12.5,0.95 L4.2
PMIC_DCDCE: C23.2 J1.7 L5.2 U1.10 | length 17.9
  L1 w0.2: -8.85,-1.75 -6.912,-1.75 -6.662,-2 -6.662,-2.15 C23.2 -5.712,-2.45 -4.262,-1 U1.10
  L1 w0.3: -9.839,-1.75 -8.85,-1.75
  L1 w0.5: -19.2,-3.81 -17.054,-3.81 -12.71,-3.81 L5.2 -12.2,-3.3 -12.2,-2.7 -11.25,-1.75 -9.839,-1.75
PMIC_EN: J3.1 U1.27 | length 18.9
  L1 w0.2: U1.27 2.2,-3.85 2.2,-4.7 5.7,-8.2 13.3,-8.2 16.52,-11.42 17.054,-11.42
PMIC_FBGND: J4.6 U1.54 | length 16.6
  L1 w0.2: -2.522,9.413 -2.522,7.978 -2.2,7.657 -2.2,5.96 -1.8,5.56 U1.54
  L1 w0.3: -2.522,9.413 -2.522,10.178 -1.27,11.43
  L1 w0.5: -1.27,11.43 -1.27,17.054 -1.27,19.2
PMIC_GPIO: J1.8 U1.14 | length 17.6
  L1 w0.2: -19.212,-6.5 -17.054,-6.5 -15.1,-6.5 -14.4,-5.8 -9.6,-5.8 -8.4,-4.6 -5.451,-4.6 -4.451,-3.599 -4.451,-3.151 -3.9,-2.6 U1.14
PMIC_I2C_SCK_R: J2.8 R2.1 U1.23 | length 18.4
  L1 w0.2: U1.23 0.6,-5.752 0.3,-6.052 0.3,-9.4 0.5,-9.6 R2.1 1.25,-10.85 6.3,-15.9 6.3,-17.054 6.3,-19.202
PMIC_I2C_SDA_R: J2.9 R1.1 U1.24 | length 16.8
  L1 w0.2: U1.24 1,-8.55 R1.1 8.6,-16.15 8.6,-17.054
PMIC_IRQ: J1.10 R3.1 U1.16 | length 20.6
  L1 w0.2: -19.19,-11.44 -17.054,-11.44 -15.04,-11.44 -12.346,-8.746 R3.1 -11.368,-8.709 -9.722,-8.709 -6.453,-5.439 -4.627,-5.439 -4.227,-5.039 -3.223,-5.039 -2.2,-4.016 U1.16
PMIC_MODSET: R7.2 R8.1 U1.55 | length 10.5
  L1 w0.2: R8.1 -3.49,12.39 -3.49,7.99 -2.7,7.2 -2.7,5.775 -2.2,5.275 U1.55
PMIC_PHSET: R9.2 R10.1 U1.26 | length 9.9
  L1 w0.2: U1.26 1.8,-5.066 6.234,-9.5 6.8,-9.5 R10.1
PMIC_PWROK: J1.9 R4.1 U1.15 | length 19.1
  L1 w0.2: -19.19,-8.9 -17.054,-8.9 -14.9,-8.9 -13.722,-7.722 R4.1@-11.405,-7.722 ; R4.1 -9.36,-7.764 -6.635,-5.039 -4.793,-5.039 -4.393,-4.639 -3.389,-4.639 -2.6,-3.85 U1.15
PMIC_SWIN: J2.6 U1.21 | length 17
  L1 w0.2: U1.21 -0.2,-3.85 -0.2,-5.166 -0.83,-5.796 -0.83,-12.47 1.4,-14.7 1.4,-17.054 1.4,-19.07 1.27,-19.2
PMIC_SWOUT: J2.7 U1.22 | length 17.7
  L1 w0.2: U1.22 0.2,-5.586 -0.3,-6.086 -0.3,-12 3.81,-16.11 3.81,-17.054 3.81,-19.2
PMIC_VINT: C4.2 J2.10 R1.2 R2.2 R3.2 R4.2 R5.1 R7.1 R9.1 U1.25 | length 56.3
  L1 w0.2: R2.2 0.55,-11.15 0.55,-11.95 v1(0.6,-12) ; U1.25 1.4,-5.5 1.6,-5.7 C4.2@1.6,-6.539 ; R1.2 2.053,-10.603 2.053,-10.773 v1(2.13,-10.85)
  L1 w0.5: R3.2 -9.546,-9.746 v1(-7.7,-7.9) ; R4.2 -9.264,-6.764 v1(-7.7,-5.2) ; R5.1 -6.6,11.1 -5.1,9.6 v1(-5.1,9.1) ; v1(-4.2,11.1) R7.1 ; C4.2 2.439,-6.55 2.9,-7.011 2.9,-7.311
  L2 w0.5: v1(-4.2,11.1) -4.2,10 v1(-5.1,9.1) -5.1,6.744 -6.458,5.386 -6.458,-3.985 -7.673,-5.2 v1(-7.7,-5.2) v1(-7.7,-7.9) -7.7,-9.644 -5.344,-12 v1(0.6,-12) ; v1@0.627,-12 0.677,-11.95 1.03,-11.95 v1@3.66,-9.319 ; v1@3.719,-9.281 v1@4.281,-8.719
  other v1: 3.7,-9.3 4.3,-8.7
PS: C1.1 C3.1 C7.1 C8.2 C12.2 C15.1 C20.2 C21.1 J2.2 R11.1 U1.3 U1.6 U1.13 U1.18 U1.30 U1.33 U1.34 U1.45 U1.46 U1.52 U1.53 | length 89.3
  L1 w0.2: R11.1 -11.9,-12.854 v1(-11.9,-12.8) ; C21.1 -6.112,-3.6 v1(-5.4,-3.6) -5.4,-3.534 -4.066,-2.2 U1.13 ; C15.1 -6.062,1.04 -5.665,1.04 -5.477,0.851 -5.477,0.677 v1(-5.4,0.6) U1.6 ; C12.2 -6.062,5.265 -6.062,5.062 -5.84,4.84 -5.838,4.84 -4.805,3.807 -4.805,2.423 -4.181,1.8 U1.3 ; -5,-9.3 -5.075,-9.225 -5.075,-6.898 -4.958,-6.78 C20.2@-4.617,-6.78 ; C20.2@-4.675,-6.839 C20.2@-4.617,-6.78 ; v1(-1.8,8.7) -1.8,6.126 -1.524,5.85 -1.4,5.85 C7.1 -1,4.715 -1.157,4.558 -1.157,4.45 ; U1.18 -1.4,-4.347 -2.892,-5.839 -3.675,-5.839 C20.2 C20.2@-4.617,-6.78 ; U1.30 4.275,-2.2 v1(5.625,-3.55) ; v1(3.8,9.5) v1@3.805,9.495
  L1 w0.3: 1.625,3.476 1.625,4.532 C1.1 2.793,5.7 3.25,5.7 3.393,5.843 ; 3.807,-0.793 4.207,-0.793 v1(5.625,0.625)
  L1 w0.5: 3.393,5.843 3.393,7.436 ; 3.394,7.437 3.394,7.823 3.805,8.235 v1@3.805,9.495
  L2 w0.2: v1(-11.9,-12.8) v1(-8.7,-12.8)
  L2 w1: v1(-5,-11) v1(-4.3,-11) 0.514,-11 5.625,-5.889 v1(5.625,-3.55) v1(5.625,0.625) ; v1(-4.3,-9.9) v1(-5,-9.9) v1(-5.7,-9.9) -6.1,-9.5 -6.114,-9.5 -6.7,-8.914 -6.7,-5.899 -5.4,-4.599 v1(-5.4,-3.6) v1(-5.4,0.6) v1(-5.4,4.4) -5.4,5.1 v1(-1.8,8.7) -1,9.5 v1(3.8,9.5)
VREF: C6.2 J3.4 U1.29 | length 15.7
  L1 w0.2: U1.29 3.85,-2.6 4.475,-3.225 4.475,-3.625 5.551,-4.7 6.2,-4.7 C6.2
  L1 w0.5: C6.2 8.49,-3.81 17.054,-3.81
pads on no net: J1.1 J1.2 J3.2 J3.8 J4.1 J4.2 J4.3 J4.7 J4.8

## Polygon pours and split planes (outlines as drawn)
GND on L1 "NONET_L-01_P-001" (solid, remove dead copper, pour order 46): -19.5,19.4 -19.5,-19.4 19.5,-19.4 19.5,19.4
PMIC_VINT on L1 "NONET_L-01_P-001" (solid, remove dead copper, pour order 44): 2.3,-7.089 2.311,-7.1 3.4,-7.1 6.3,-10 6.3,-11.9 7.1,-11.9 7.1,-11 8.3,-11 12.9,-15.6 12.9,-19.4 10.1,-19.4 10.1,-17.1 2.3,-9.3
NetL3_1 on L1 "NONET_L-01_P-001" (solid, remove dead copper, pour order 48): -0.7,3.952 -0.695,3.948 -0.097,3.948 -0.097,2.952 -0.102,2.948 -0.109,2.955 -0.707,2.955 -0.707,3.95
PS on L1 "NONET_L-01_P-001" (solid, remove dead copper, pour order 47): 1.304,3.95 1.296,3.941 1.296,2.947 1.892,2.947 1.896,2.951 1.894,2.953 1.894,3.945
NetL2_1 on L1 "NONET_L-01_P-001" (solid, remove dead copper, pour order 45): 2.95,0.298 2.953,0.294 2.953,-0.297 3.948,-0.297 3.948,0.303 2.955,0.303 2.951,0.3
PS on L1 "NONET_L-01_P-001" (solid, remove dead copper, pour order 1): 3.927,-0.5 3.927,-0.626 3.927,-1.1 2.953,-1.1 2.953,-0.5
NetL1_1 on L1 "NONET_L-01_P-001" (solid, remove dead copper, pour order 39): 2.1,3.245 2.1,3.954 2.609,3.956 3.843,5.158 3.843,7.25 5.299,7.25 5.299,5.501 5.3,5.5 2.754,2.954 2.1,2.954 2.096,2.951
GND on L1 "NONET_L-01_P-001" (solid, remove dead copper, pour order 37): 3.946,2.1 3.945,2.1 2.4,2.1 2.4,2.6 3.947,2.6
GND on L1 "NONET_L-01_P-001" (solid, remove dead copper, pour order 38): 0.098,3.995 0.7,3.995 0.7,3.944 0.7,2.5 0.1,2.5
PS on L1 "NONET_L-01_P-001" (solid, remove dead copper, pour order 33): -1.498,2.95 -1.492,2.944 -0.902,2.944 -0.902,4.895 -0.904,4.897 -0.896,4.905 -0.496,4.905 -0.496,6.008 -0.492,6.012 -1.494,6.012
BLDO2 on L1 "NONET_L-01_P-001" (solid, remove dead copper, pour order 29): -3.9,2.508 -3.9,5 -3.4,5 -3.186,4.786 -3.186,2.508
PS on L1 "NONET_L-01_P-001" (solid, remove dead copper, pour order 23): -7.7,-19.4 -10,-19.4 -10,-13.5 -5.7,-9.2 -3.832,-9.2 -3.832,-11.232 -7.7,-15.1
GND on L1 "NONET_L-01_P-001" (solid, remove dead copper, pour order 3): 3.958,0.501 2.501,0.501 2.5,0.5 2.5,1.1 3.958,1.1
GND on L2 "NONET_L-01_P-001" (solid, remove dead copper, pour order 0): -19.5,19.4 -19.5,-19.4 19.5,-19.4 19.5,19.4

## Keep-outs
Keep-Out Layer:
  the board outline again, w0.25

## Silkscreen, mask and mechanical layers (free items; w line width, h text height)
Top Overlay:
  text "MODSET" at -3.3,14.643 h0.5 r270
  text "DCBSET" at -8.143,13.9 h0.5
  text "annad / Karaganda 2025" at -1.699,11.9 h1
  text "PHSET" at 5.757,-9.7 h0.5
  text "PWR" at -10.052,-13.848 h1 r90
  text "'.VersionRevision'" at 18,-19.2 h0.5
Bottom Overlay:
  text "BLDO2" at -8.22,16.285 h1 r90
  text "FBGND" at -0.6,16.285 h1 r90
  text "DCDCC" at 4.48,16.285 h1 r90
  text "BLDO1" at -10.76,16.118 h1 r90
  text "GND" at 1.94,16.118 h1 r90
  text "DCDCA" at 16.64,10.754 h1
  text "DCDCB" at 16.64,8.214 h1
  text "BLDO3" at -16.627,7.031 h1 r180
  text "BLDO4" at -16.627,4.491 h1 r180
  text "ALDO3" at 16.64,3.134 h1
  text "DCDCD" at -16.627,1.951 h1 r180
  text "GND" at 16.474,0.594 h1
  text "ALDO2" at 16.64,-1.946 h1
  text "DCDCE" at -16.627,-3.129 h1 r180
  text "VREF" at 16.474,-4.486 h1
  text "GPIO" at -16.461,-5.669 h1 r180
  text "ALDO1" at 16.474,-7.026 h1
  text "PWROK" at -16.627,-8.209 h1 r180
  text "IRQ" at -16.461,-10.749 h1 r180
  text "EN" at 16.474,-12.129 h1
  text "+5V" at -9.515,-16.421 h1 r270
  text "CLDO1" at -6.952,-16.421 h1 r270
  text "GND" at -1.872,-16.421 h1 r270
  text "SWIN" at 0.668,-16.421 h1 r270
  text "SCK" at 5.748,-16.421 h1 r270
  text "SDA" at 8.288,-16.421 h1 r270
  text "VINT" at 10.828,-16.421 h1 r270
  text "CLDO3" at -12.055,-16.588 h1 r270
  text "CLDO2" at -4.412,-16.588 h1 r270
  text "SWOUT" at 3.208,-16.588 h1 r270
Mechanical Drawing:
  the board outline again, w0.5
  text "Mechanical Drawing Layer of AXP805 Debug Board '.VersionRevision'" at -24.907,26 h1.75
  text "Units: mm / Scale: 1:1" at -44.323,15 h2
Manufacturing Notes:
  lines w0.2: 33,-7.93 71.978,-7.93 ; 33,-2.533 63.73,-2.533 63.722,-2.525 ; 63.722,2 63.722,-2.525 ; 72.015,-2.506 71.996,-2.525 63.722,-2.525 ; 33,-12 33,2 72,2 72,-12 33,-12
  text "Files: / *.GTO - Top Overlay / *.GTP - Top Paste / *.GTS - Top Solder / *.GTL - L1 (Positive) / *.GBL - L2 (Positive) / *.GBS - Bottom Solder / *.GBO - Bottom Overlay / *.GM2 - Mechanical Drawing / *.GM3 - Manufacturing Notes / *.GM4 - License / *.GM15 - Assembly instructions / *.GM28 - Board Outline" at -23,34 h1
  text "Board info: / Minimum Track: 200um / Minimum Gap: 200um / Minimum Though Hole VIA: 0.6mm (pad) / 0.3mm (drill). Drilling L1-L2 /  / 1. FINISHED PANEL THICKNESS IS NOT CRITICAL: TO BE APPROXIMATELY 1.6mm /  / 2. BOARD FINISH: IMMERSION Au/ELECTROLESS Ni; 0.05-0.12 um GOLD; 3-6um NICKEL /  / 3. SOLDER RESIST: APPLY TO BOTH SIDES COLOR - BLUE /  / 4. COMPONENT IDENT: COLOR TO BE WHITE /  / 5. CASTELLATED HOLES PRESENT ON BOARD EDGES: /    - Hole size: 0.76mm" at 32,13 h1
  text "'.VersionRevision'" at 65.417,-2 h1.5
  text "AXP 805 Debug Board" at 33.53,-2.533 h1.5
  text "Designed by Anna Dostoevskaya" at 34.313,-7 h1.2
  text "Contact: iwantknow.aboutjt68h43@gmail.com" at 37.213,-11 h0.8
Assembly instructions:
  text "Assembly Layer of AXP805 Debug Board '.VersionRevision'" at -19.976,24 h1
Board Outline:
  the board outline again, w0.25

## Dimensions
-11.43,19.746 to -20,19.746 on Mechanical Drawing
-11.43,19.746 to 11.43,19.746 on Mechanical Drawing
-20,-20 to -20,20 on Mechanical Drawing